# Altium PCB ACS_PCB_P1.PcbDoc
Units mm, origin at the board's own origin, x right, y up, seen from the top; angles counter-clockwise.
Board outline 75 x 46 mm, 2 copper layers (Top Layer, Bottom Layer); 36 components, 25 nets, 126 pads, 23 vias.
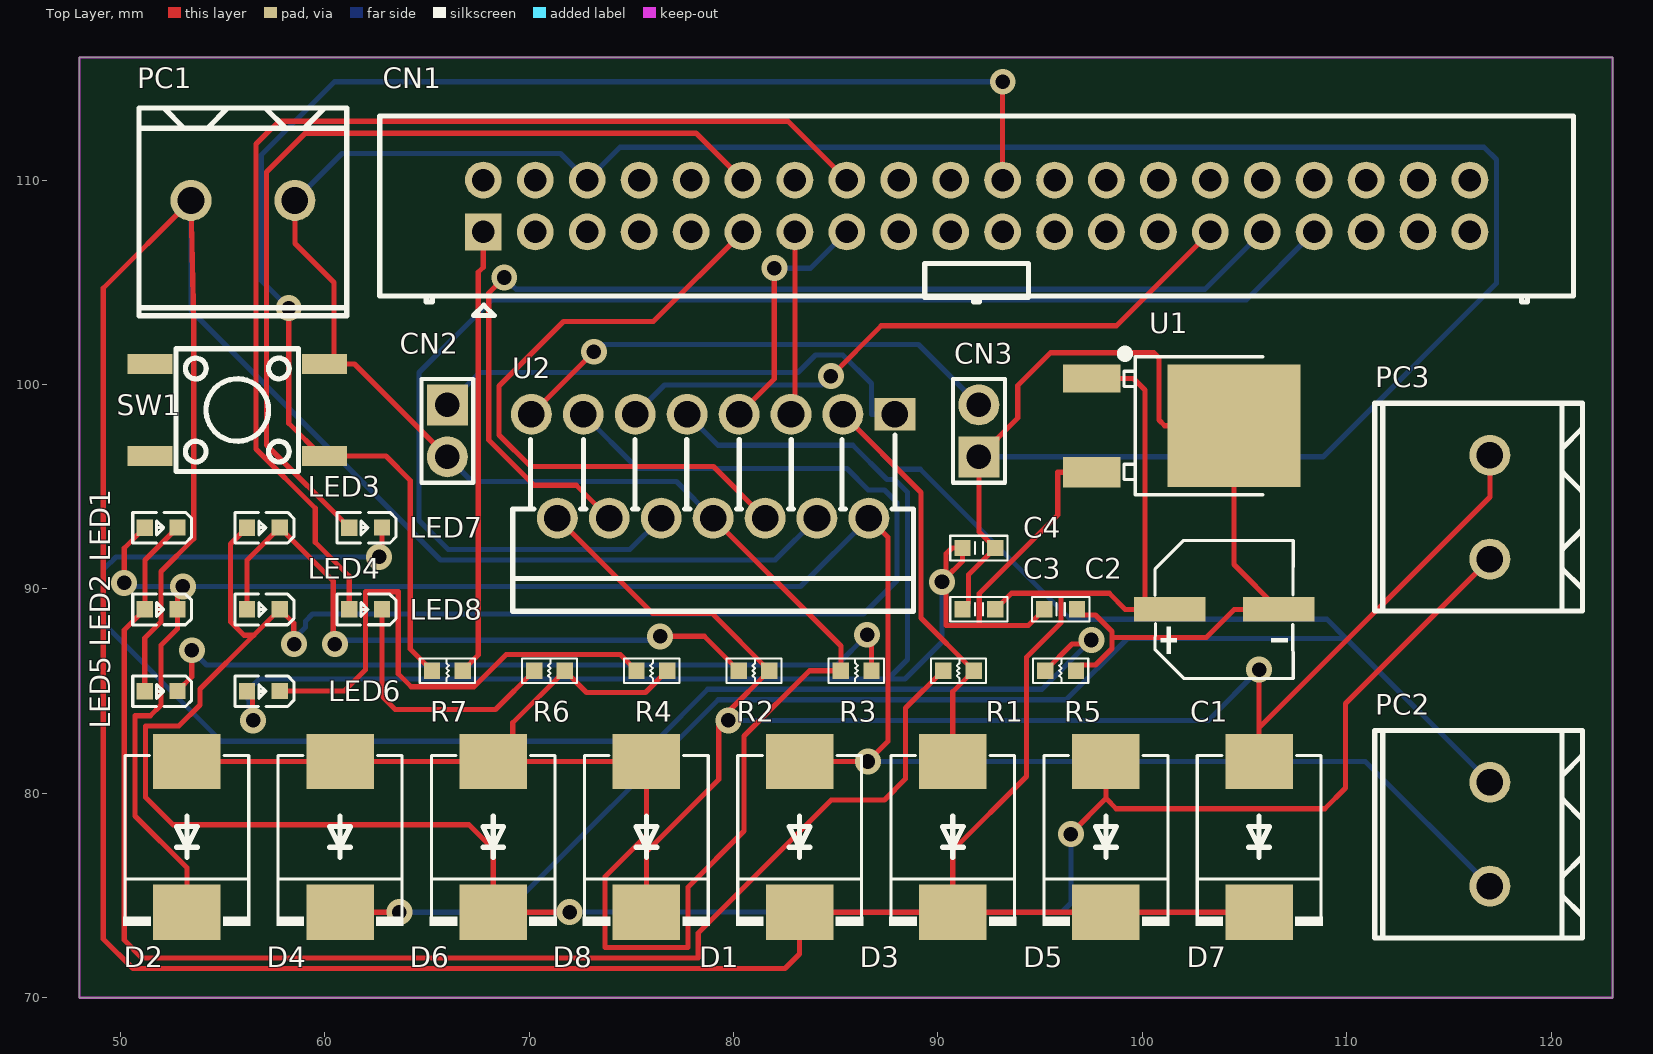
[diagram p0: Top Layer view]
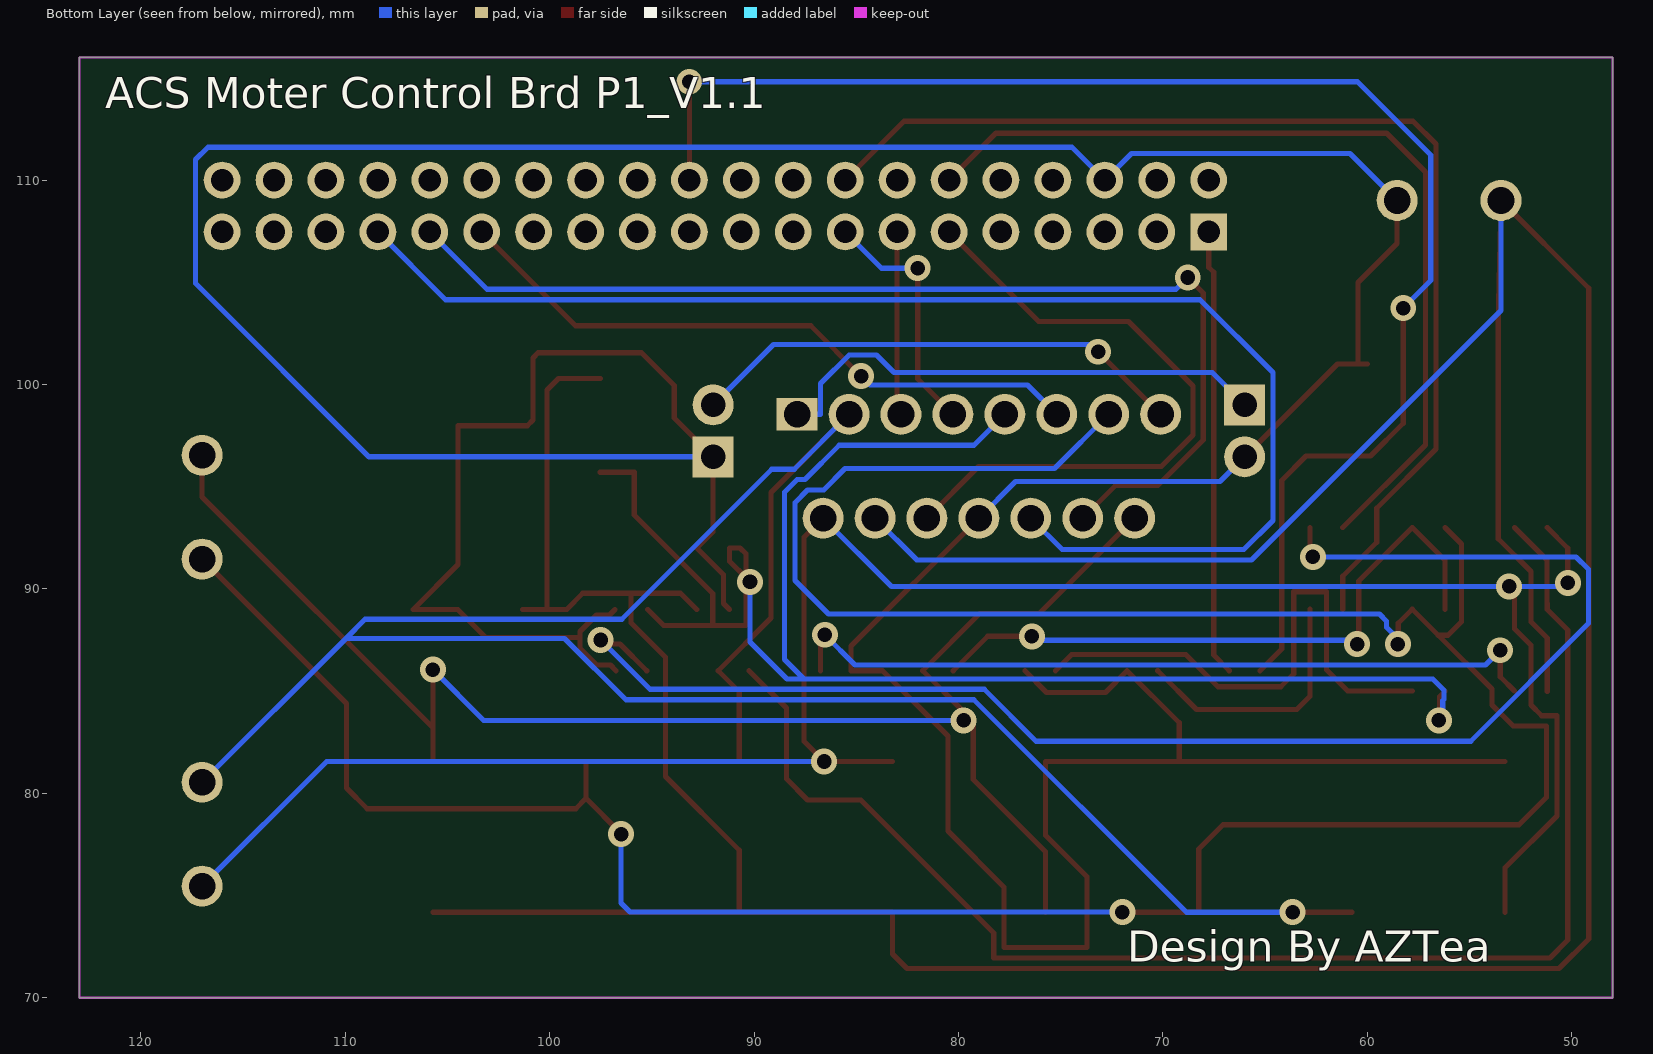
[diagram p1: Bottom Layer view, seen from below]

## Layer stack, top to bottom
Top Solder: solder mask 0.0102, Solder Resist, Dk 3.5
Top Layer: signal copper 0.0356
Dielectric 1: dielectric 0.32, FR-4, Dk 4.8
Bottom Layer: signal copper 0.0356
Bottom Solder: solder mask 0.0102, Solder Resist, Dk 3.5

## Board outline
48,70 48,116 123,116 123,70

## Design rules (kind name [scope] priority, off if disabled: settings)
Clearance [All] p1: gap=0.254 ignorepadtopadclearanceinfootprint=FALSE except(0: Arc-Hole Track-Hole SMDPad-Hole THPad-Hole Via-Hole Fill-Hole Poly-Hole Region-Hole Text-Hole)
MinimumSolderMaskSliver [All] p1: minsoldermaskwidth=0.1
PolygonConnect [All] p1: connectstyle=Relief reliefconductorwidth=0.254 reliefentries=4 polygonreliefangle="90 Angle" airgapwidth=0.254
RoutingVias [All] p1: holewidth=0.711 width=1.27 viastyle="Through Hole" minholewidth=0.711 minwidth=1.27 maxholewidth=0.711 maxwidth=1.27
SMDNeckDown [All] p1: percent=50.000
SilkToSilkClearance [All] p1: silktosilkclearance=0.1
SilkToSolderMaskClearance [IsPad] p1: minsilkscreentomaskgap=0 clearancetoexposedcopper=TRUE
SolderMaskExpansion [All] p1: expansion=0.102 istentingtop=FALSE
Width [All] p1: maxlimit=0.254 minlimit=0.254 preferedwidth=0.254
27 further rules are at their usual default settings.

## Components (designator, comment, footprint, x,y, rotation, side; value= is the part's Value field where it differs from the comment)
C1 "220u" C0605 104,89 r0 top
C2 "0.1u" C0603 96,89 r0 top
C3 "0.1u" C0603 92,89 r0 top
C4 "0.1u" C0603 92,92 r180 top
CN1 "GPIO_40Pin_M" GPIO_40Pin_M 91.89,108.73 r0 top
CN2 "Connector" 2PIN 66,97.73 r270 top
CN3 "Connector" 2PIN 92,97.73 r90 top
D1 "SS52" SMC(DO-214AB) 83.23,77.995 r90 top
D2 "SS52" SMC(DO-214AB) 53.258,77.995 r90 top
D3 "SS52" SMC(DO-214AB) 90.723,77.995 r90 top
D4 "SS52" SMC(DO-214AB) 60.751,77.995 r90 top
D5 "SS52" SMC(DO-214AB) 98.216,77.995 r90 top
D6 "SS52" SMC(DO-214AB) 68.244,77.995 r90 top
D7 "SS52" SMC(DO-214AB) 105.709,77.995 r90 top
D8 "SS52" SMC(DO-214AB) 75.737,77.995 r90 top
LED1 "Green" LED0603 52,93 r180 top
LED2 "Blue" LED0603 52,89 r180 top
LED3 "Green" LED0603 57,93 r180 top
LED4 "Blue" LED0603 57,89 r180 top
LED5 "Green" LED0603 52,85 r180 top
LED6 "Green" LED0603 57,85 r180 top
LED7 "Green" LED0603 62,93 r180 top
LED8 "Green" LED0603 62,89 r180 top
PC1 "PConnector" PC_2Pin 56,109 r180 top
PC2 "PConnector" PC_2Pin 117,78 r90 top
PC3 "PConnector" PC_2Pin 117,94 r90 top
R1 "20k" R0603 91,86 r180 top
R2 "20k" R0603 81,86 r180 top
R3 "20k" R0603 86,86 r0 top
R4 "4.7k" R0603 76,86 r180 top
R5 "220" R0603 96,86 r180 top
R6 "220" R0603 71,86 r180 top
R7 "10k" R0603 66,86 r0 top
SW1 "Switch" Switch 55.725,98.75 r90 top
U1 "78M05" 78M05 101,98 r0 top
U2 "L298N" L298N 79,96 r180 top

## Footprints (in the part's own frame and the unit in brackets; to place one, negate y for a bottom-side part, rotate by r counter-clockwise, add the part's x,y. Pads: shape width x height; smd on the part's side, far side on the other; paste and mask are expansions set on the pad)
2PIN [mm]
  rect 2x2 hole 1.2: 1(-1.27,0)
  round 2 hole 1.2: 2(1.27,0)
  silkscreen extent -2.54,-1.27 2.54,1.27
78M05 [mm] "TO-252-2"
  rect 2.8x1.35 smd: 1(-3.475,2.29)
  rect 2.8x1.5 smd: 3(-3.475,-2.29)
  rect 6.5x6 smd: 4(3.475,-0.017)
  silkscreen extent -2.06,-3.39 4.9,3.7
C0603 [mm]
  rect 0.8x0.8 smd: 1(-0.8,0) 2(0.8,0)
  silkscreen extent -1.4,-0.6 1.4,0.6, body extent -0.8,-0.41 0.8,0.41, height 0.9
C0605 [mm] "RVT220UF35V67RV0024"
  rect 3.5x1.2 smd: 1(-2.67,0) 2(2.67,0)
  silkscreen extent -3.38,-3.38 3.38,3.38
GPIO_40Pin_M [mm]
  rect 1.8x1.8 hole 1.1: 1(-24.13,-1.27)
  round 1.8 hole 1.1: 2(-24.13,1.27) 3(-21.59,-1.27) 4(-21.59,1.27) 5(-19.05,-1.27) 6(-19.05,1.27) 7(-16.51,-1.27) 8(-16.51,1.27) 9(-13.97,-1.27) 10(-13.97,1.27) 11(-11.43,-1.27) 12(-11.43,1.27) 13(-8.89,-1.27) 14(-8.89,1.27) 15(-6.35,-1.27) 16(-6.35,1.27) 17(-3.81,-1.27) 18(-3.81,1.27) 19(-1.27,-1.27) 20(-1.27,1.27) 21(1.27,-1.27) 22(1.27,1.27) 23(3.81,-1.27) 24(3.81,1.27) 25(6.35,-1.27) 26(6.35,1.27) 27(8.89,-1.27) 28(8.89,1.27) 29(11.43,-1.27) 30(11.43,1.27) 31(13.97,-1.27) 32(13.97,1.27) 33(16.51,-1.27) 34(16.51,1.27) 35(19.05,-1.27) 36(19.05,1.27) 37(21.59,-1.27) 38(21.59,1.27) 39(24.13,-1.27) 40(24.13,1.27)
  silkscreen extent -29.2,-5.36 29.2,4.4
L298N [mm] "Multiwatt 15"
  rect 2x1.6 hole 1.3: 1(-8.89,-2.54)
  round 2 hole 1.3: 2(-7.62,2.54) 3(-6.35,-2.54) 4(-5.08,2.54) 5(-3.81,-2.54) 6(-2.54,2.54) 7(-1.27,-2.54) 8(0,2.54) 9(1.27,-2.54) 10(2.54,2.54) 11(3.81,-2.54) 12(5.08,2.54) 13(6.35,-2.54) 14(7.62,2.54) 15(8.89,-2.54)
  silkscreen extent -9.8,-1.52 9.8,7.09
LED0603 [mm]
  rect 0.8x0.8 smd: 1(-0.799,-0.004) 2(0.799,0.003)
  silkscreen extent -1.49,-0.75 1.39,0.76
PC_2Pin [mm]
  round 2 hole 1.3: 1(-2.54,0) 2(2.54,0)
  silkscreen extent -5.08,-4.52 5.08,5.64
R0603 [mm]
  rect 0.8x0.8 smd: 1(-0.75,0) 2(0.75,0)
  silkscreen extent -1.35,-0.6 1.35,0.6, body extent -0.8,-0.4 0.8,0.41, height 0.9
SMC(DO-214AB) [mm]
  rect 2.7x3.3 smd: 1(-3.81,0) 2(3.563,0)
  silkscreen extent -4.48,-3.1 3.85,3.1
Switch [mm]
  rect 0.98x2.2 smd: 1(-2.25,-4.275) 2(-2.25,4.275) 3(2.25,-4.275) 4(2.25,4.275)
  silkscreen extent -3,-3 3,3

## Part data
C1: library part "cap 0605", "C0605 Electrolytic Capacitor"
C2 C3 C4: library part "cap 0603 NonE", "C0603 non Electrolytic Capacitor"
CN1: "GPIO 40pin Male Connector"
CN2 CN3: "2pin connector"
D1 D2 D3 D4 D5 D6 D7 D8: "SS52 Diode"
LED1 LED2 LED3 LED4 LED5 LED6 LED7 LED8: library part "led 0603", "LED0603"
PC1 PC2 PC3: "2Pin"
R1 R2 R3 R4 R5 R6 R7: library part "Res 0603", "Resistor", Rang=1%, Revision="July-2002: Re-released for DXP Platform."
U1: "Linear Voltage Regulators (LDO)"
U2: "HGSEMI L298N"

## Via types
v1: diameter 1.27, hole 0.711, Top Layer to Bottom Layer, 23 vias

## Nets (pads, with @x,y where several pads share a name; then routed paths per layer and width w, separated by ;. In a path a pad name is that pad's centre, name@x,y a point inside that pad or via, vN(x,y) a via of type N, cw(c..) or ccw(c..) an arc to the next point about the centre after c; other vN are vias at no path point)
3d3V_DC: CN1.1 R7.2 | length 21.9
  Top Layer w0.254: R7.2 67.513,86.763 67.513,105.487 67.76,105.734 CN1.1
GND: C1.2 C2.2 C3.1 C4.1 CN1.6 CN2.2 CN3.1 D2.2 D4.2 D6.2 D8.2 PC1.1 R3.1 R4.1 R5.1 R6.1 SW1.3 U1.4 U2.8 | length 253.5
  Top Layer w0.254: D2.2 D4.2 D6.2 D6.2@69.199,81.558 ; PC1.1 58.54,106.898 60.448,104.99 SW1.3@60.448,101 ; SW1.3 SW1.3@60.448,101 ; CN2.2 61.46,101 SW1.3@60.448,101 ; R4.1 75.688,84.938 72.812,84.938 R6.1 69.199,83.449 D6.2@69.199,81.558 ; U2.8 85.25,87.21 R3.1 83.714,86 80.518,82.804 80.518,78.156 77.768,75.406 77.768,72.454 73.706,72.454 73.706,75.921 75.737,77.952 D8.2 D6.2@69.199,81.558 ; C3.1 91.492,89.292 91.492,90.692 C4.1 92,92.8 CN3.1 93.904,98.364 93.904,99.949 95.504,101.549 100.559,101.549 100.813,101.295 100.813,98.262 101.092,97.983 U1.4 104.475,91.195 C1.2 104.494,89 103.124,87.63 98.516,87.63 ; R5.1 97.023,86.273 97.71,86.273 98.516,87.079 98.516,87.63 ; C2.2 97.073,88.727 97.71,88.727 98.516,87.921 98.516,87.63
  Bottom Layer w0.254: PC1.1 60.843,111.303 71.537,111.303 CN1.6 74.448,111.608 116.713,111.608 117.323,110.998 117.323,104.953 108.83,96.46 CN3.1 ; CN2.2 67.21,95.25 77.21,95.25 U2.8
GPIO5: CN1.29 U2.11 | length 31.8
  Top Layer w0.254: v1(84.76,100.406) 87.224,102.87 98.73,102.87 CN1.29
  Bottom Layer w0.254: U2.11 76.624,99.974 84.328,99.974 v1(84.76,100.406)
GPIO6: CN1.31 U2.12 | length 54.2
  Top Layer w0.254: v1(68.783,105.232) 68.021,104.47 68.021,97.282 70.231,95.072 72.308,95.072 U2.12
  Bottom Layer w0.254: v1(68.783,105.232) 69.36,104.655 103.055,104.655 CN1.31
GPIO13: CN1.33 U2.10 | length 66.9
  Bottom Layer w0.254: U2.10 74.923,91.923 66.04,91.923 64.618,93.345 64.618,100.584 68.181,104.147 105.087,104.147 CN1.33
GPIO14: CN1.12 LED7.2 | length 44.1
  Top Layer w0.254: LED7.2 57.15,97.047 57.15,110.388 59.055,112.293 78.167,112.293 CN1.12
GPIO17: CN1.11 U2.6 | length 32.1
  Top Layer w0.254: CN1.11 76.073,103.073 71.679,103.073 68.529,99.924 68.529,97.536 70.079,95.987 79.013,95.987 U2.6
GPIO18: CN1.16 LED8.2 | length 55.2
  Top Layer w0.254: LED8.2 61.201,90.615 59.538,92.278 59.538,93.941 56.642,96.837 56.642,111.76 57.76,112.878 82.662,112.878 CN1.16
GPIO22: CN1.15 U2.7 | length 12.1
  Top Layer w0.254: U2.7 81.991,100.261 v1(81.991,105.689)
  Bottom Layer w0.254: v1(81.991,105.689) 83.769,105.689 CN1.15
GPIO25: CN1.22 R7.1 SW1.1 | length 73.1
  Top Layer w0.254: v1(58.242,103.734) 58.242,98.1 59.842,96.5 SW1.1 62.992,96.5 64.186,95.306 64.186,87.064 R7.1 ; CN1.22 93.16,114.801 v1(93.167,114.808)
  Bottom Layer w0.254: v1(58.242,103.734) 56.896,105.08 56.896,111.227 60.477,114.808 v1(93.167,114.808)
GPIO27: CN1.13 U2.5 | length 9
  Top Layer w0.254: U2.5 83.007,98.737 83.007,105.816 83,105.824 CN1.13
NetCN2_1: CN2.1 U2.1 | length 25
  Bottom Layer w0.254: CN2.1 67.584,100.584 83.15,100.584 84.011,101.445 85.344,101.445 86.741,100.048 86.741,98.54 U2.1
NetCN3_2: CN3.2 U2.15 | length 24.5
  Top Layer w0.254: U2.15 v1(73.17,101.6)
  Bottom Layer w0.254: v1(73.17,101.6) 73.523,101.953 89.047,101.953 CN3.2
NetLED1_1: LED1.1 LED2.2 R1.2 | length 70.3
  Top Layer w0.254: LED1.1 51.206,91.41 51.206,89.281 51.201,89.281 LED2.2 50.19,87.986 50.19,72.822 51.066,71.946 78.276,71.946 78.276,73.171 84.774,79.669 87.376,79.669 88.417,80.71 88.417,84.167 R1.2
NetLED3_1: LED3.1 LED4.2 R2.2 | length 32.1
  Top Layer w0.254: LED4.2 56.201,91.405 LED3.1 60.42,90.383 60.42,87.38 v1(60.5,87.3) ; v1(76.403,87.681) 78.569,87.681 R2.2
  Bottom Layer w0.254: v1(60.5,87.3) 60.691,87.49 76.213,87.49 v1(76.403,87.681)
NetLED5_1: LED5.1 R3.2 | length 38.1
  Top Layer w0.254: LED5.1 53.5,85.704 v1(53.5,87) ; v1(86.538,87.757) 86.75,87.545 R3.2
  Bottom Layer w0.254: v1(53.5,87) 53.504,87 54.221,86.284 85.065,86.284 v1(86.538,87.757)
NetLED6_1: LED6.1 R4.2 | length 27
  Top Layer w0.254: LED6.1 60.96,85.004 62.001,86.045 62.001,89.865 63.602,89.865 63.602,85.852 64.237,85.217 67.31,85.217 68.885,86.792 74.458,86.792 R4.2
NetLED7_1: LED7.1 R5.2 | length 73.5
  Top Layer w0.254: v1(62.662,91.567) 62.799,91.705 LED7.1 ; R5.2 96.556,87.306 97.306,87.306 v1(97.5,87.5)
  Bottom Layer w0.254: v1(62.662,91.567) 49.784,91.567 49.174,90.957 49.174,88.316 54.94,82.55 76.2,82.55 78.74,85.09 95.09,85.09 v1(97.5,87.5)
NetLED8_1: LED8.1 R6.2 | length 12.8
  Top Layer w0.254: LED8.1 62.799,84.749 63.449,84.099 68.349,84.099 R6.2
Output1: D1.2 D2.1 LED1.2 LED2.1 PC2.1 U2.2 | length 108.4
  Top Layer w0.254: v1(50.19,90.297) 50.19,91.986 LED1.2 ; v1(53.061,90.119) 52.799,89.858 LED2.1 52.799,88.052 51.994,87.246 51.994,84.328 51.463,83.797 50.719,83.797 50.719,78.897 53.258,76.358 D2.1 ; D1.2 v1(86.565,81.558) 87.554,82.547 87.554,92.526 U2.2
  Bottom Layer w0.254: v1(50.19,90.297) 50.368,90.119 v1(53.061,90.119) 83.279,90.119 U2.2 ; v1(86.565,81.558) 110.902,81.558 PC2.1
Output2: D3.2 D4.1 PC2.2 R1.1 U2.3 | length 113.9
  Top Layer w0.254: D4.1 v1(63.652,74.185) ; U2.3 89.168,94.722 89.168,88.582 R1.1 90.723,84.973 D3.2
  Bottom Layer w0.254: v1(63.652,74.185) 68.851,74.185 79.248,84.582 96.266,84.582 99.263,87.579 109.961,87.579 ; U2.3 88.033,95.857 89.13,95.857 96.471,88.516 109.024,88.516 109.961,87.579 ; PC2.2 109.961,87.579
Output3: D5.2 D6.1 LED3.2 LED4.1 PC3.1 U2.13 | length 157
  Top Layer w0.254: LED3.2 55.397,92.193 55.397,88.392 56.058,87.732 56.528,87.732 ; v1(58.5,87.3) 58.487,87.313 58.487,88.316 LED4.1 56.528,87.732 ; v1(71.984,74.193) 71.975,74.185 D6.1 68.244,77.273 67.056,78.461 52.573,78.461 51.227,79.807 51.227,83.289 52.86,83.289 53.899,84.328 53.899,85.103 56.528,87.732 ; v1(96.5,78) 96.5,78.04 98.216,79.756 ; D5.2 98.216,79.756 ; PC3.1 109.931,84.391 109.931,80.264 108.915,79.248 98.724,79.248 98.216,79.756
  Bottom Layer w0.254: v1(58.5,87.3) 58.5,87.575 59.054,88.128 59.054,88.416 59.411,88.773 86.36,88.773 88.001,90.414 88.001,94.216 87.376,94.841 86.591,94.841 85.547,95.885 75.305,95.885 U2.13 ; v1(71.984,74.193) 96.063,74.193 96.5,74.631 v1(96.5,78)
Output4: D7.2 D8.1 PC3.2 R2.1 U2.14 | length 77.7
  Top Layer w0.254: U2.14 76.044,88.796 78.954,88.796 R2.1 v1@79.748,83.998 ; D8.1 75.737,77.14 79.273,80.676 79.273,83.523 v1@79.748,83.998 ; v1(79.748,83.566) v1@79.748,83.998 ; D7.2 105.709,83.205 ; v1(105.709,86.055) 105.709,83.205 ; PC3.2 117,94.496 105.709,83.205
  Bottom Layer w0.254: v1(79.748,83.566) 103.22,83.566 v1(105.709,86.055)
VCC_12V: C1.1 C3.2 D1.1 D3.1 D5.1 D7.1 LED5.2 PC1.2 U1.1 U2.4 | length 204.8
  Top Layer w0.254: LED5.2 51.201,87.599 51.994,88.392 51.994,90.856 53.594,92.456 53.594,102.944 PC1.2 49.169,104.709 49.169,72.878 50.622,71.425 82.519,71.425 83.23,72.136 D1.1 D3.1 ; C3.2 93.589,89.789 96.012,89.789 ; U1.1 99.568,100.29 100.127,99.731 C1.1@100.127,89 ; C1.1 C1.1@100.127,89 ; D7.1 D5.1 D3.1 ; D3.1 90.723,77.216 94.327,80.82 94.327,86.656 96.012,88.341 96.012,89.789 ; 96.012,89.789 98.374,89.789 99.163,89 C1.1@100.127,89
  Bottom Layer w0.254: PC1.2 53.46,103.614 65.659,91.415 82.035,91.415 U2.4
VSS_5V: C2.1 C4.2 LED6.2 U1.3 U2.9 | length 85.3
  Top Layer w0.254: LED6.2 56.474,84.724 56.474,83.592 v1(56.5,83.566) ; v1(90.195,90.348) v1@90.399,90.551 ; C2.1 94.414,88.214 92.019,88.214 ; U1.3 95.86,95.71 95.86,93.622 92.019,89.781 92.019,88.214 ; v1@90.399,90.551 91.2,91.352 C4.2 90.678,92 90.399,91.721 v1@90.399,90.551 ; v1@90.399,90.551 90.399,88.214 92.019,88.214
  Bottom Layer w0.254: v1(56.5,83.566) 56.306,83.76 56.306,84.543 56.251,84.598 56.251,85.047 56.802,85.598 57.252,85.598 87.554,85.598 ; U2.9 79.242,97.028 85.827,97.028 87.506,95.349 87.884,95.349 88.509,94.724 88.509,86.553 87.554,85.598 ; v1(90.195,90.348) 90.195,87.401 88.392,85.598 87.554,85.598
pads on no net: CN1.2 CN1.3 CN1.4 CN1.5 CN1.7 CN1.8 CN1.9 CN1.10 CN1.14 CN1.17 CN1.18 CN1.19 CN1.20 CN1.21 CN1.23 CN1.24 CN1.25 CN1.26 CN1.27 CN1.28 CN1.30 CN1.32 CN1.34 CN1.35 CN1.36 CN1.37 CN1.38 CN1.39 CN1.40 SW1.2 SW1.4

## Keep-outs
Keep-Out Layer:
  the board outline again, w0.1

## Silkscreen, mask and mechanical layers (free items; w line width, h text height)
Bottom Overlay:
  text "ACS Moter Control Brd P1_V1.1" at 121.746,113.508 h1.52
  text "Design By AZTea" at 71.746,71.762 h1.52